# EAGLE board InkTime_PCB_4_layers (EAGLE 9.7.0)
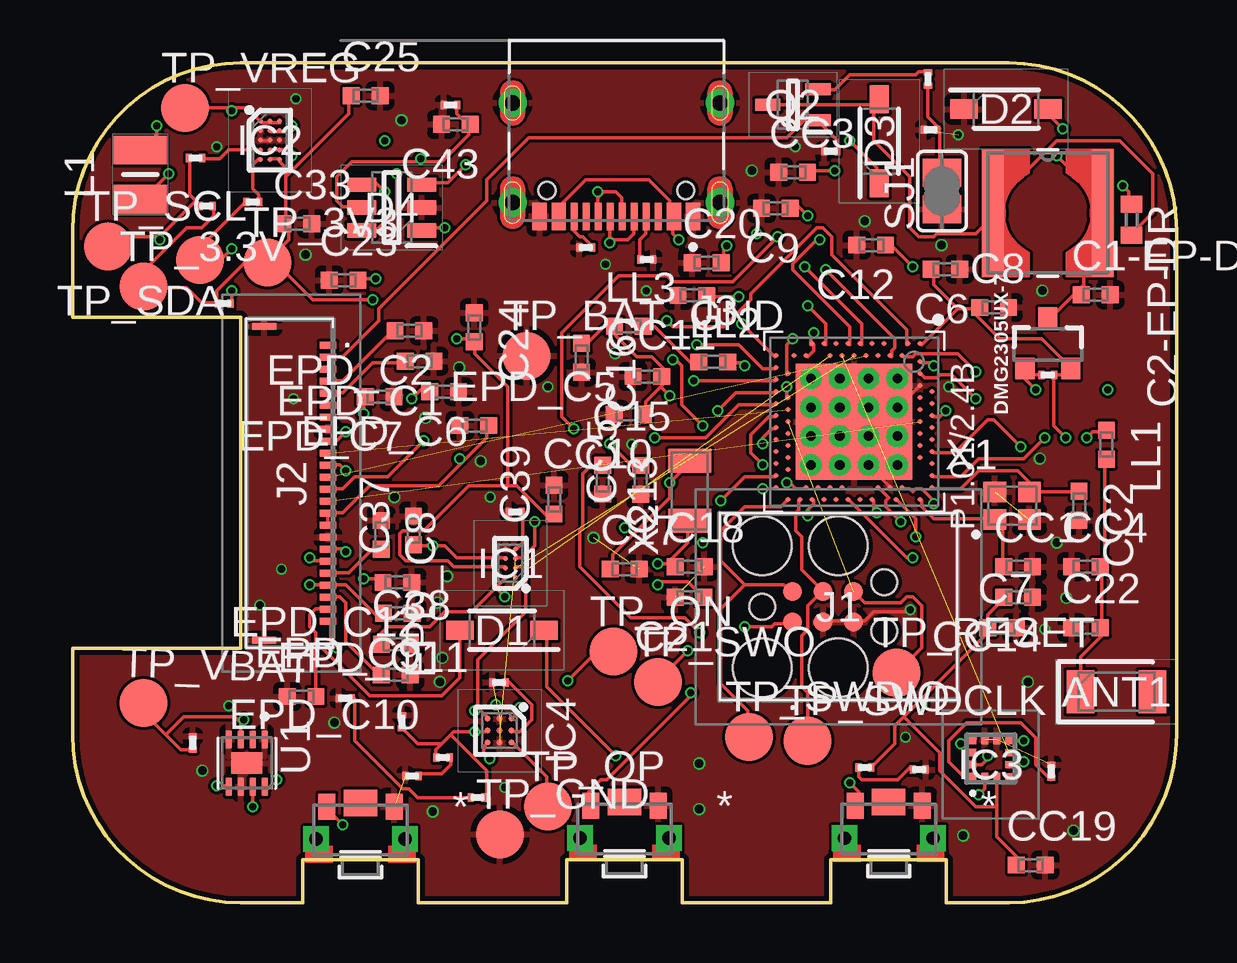
[diagram p0: board, top side]
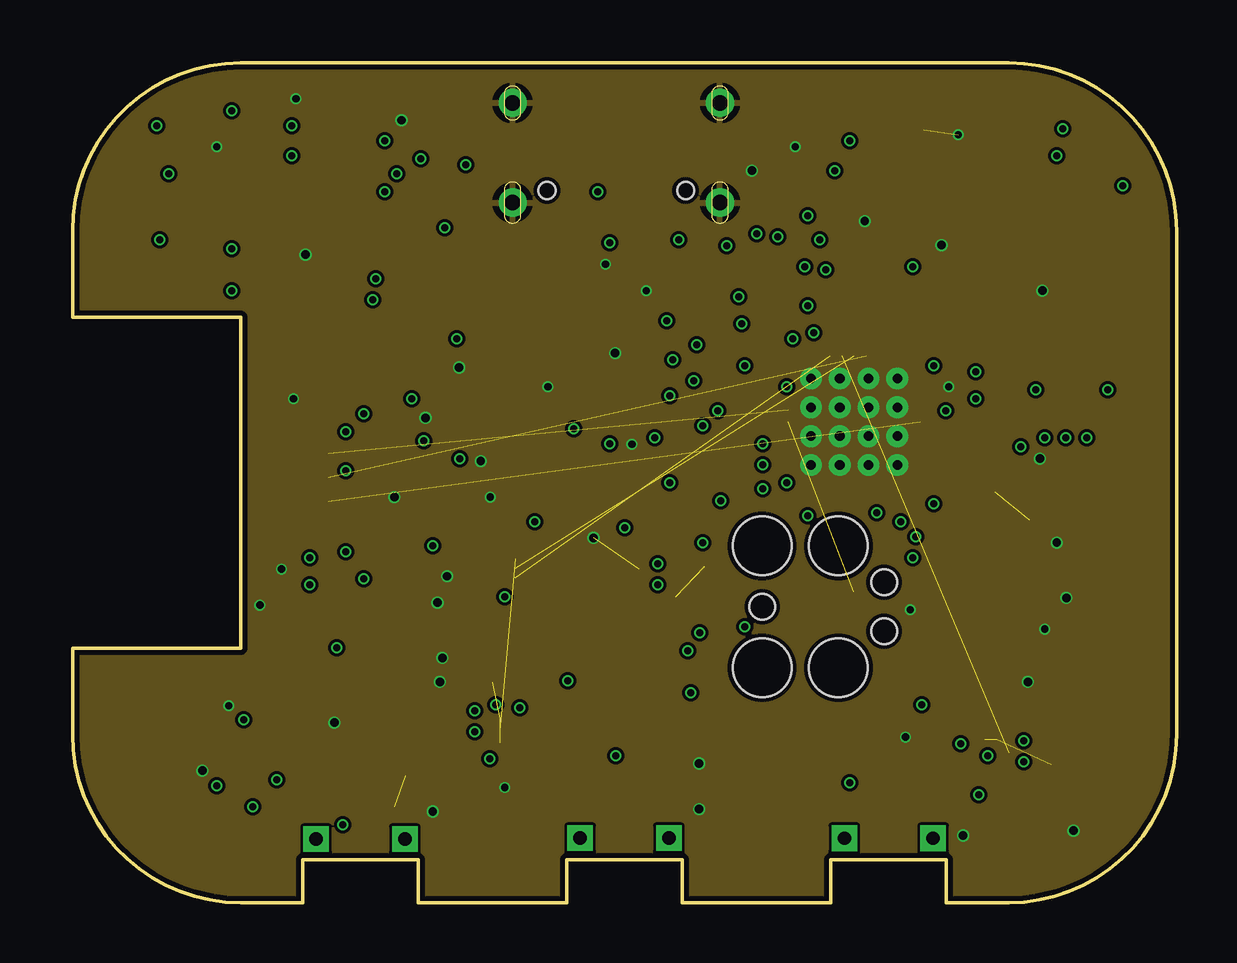
[diagram p1: board, inner layer Route2]
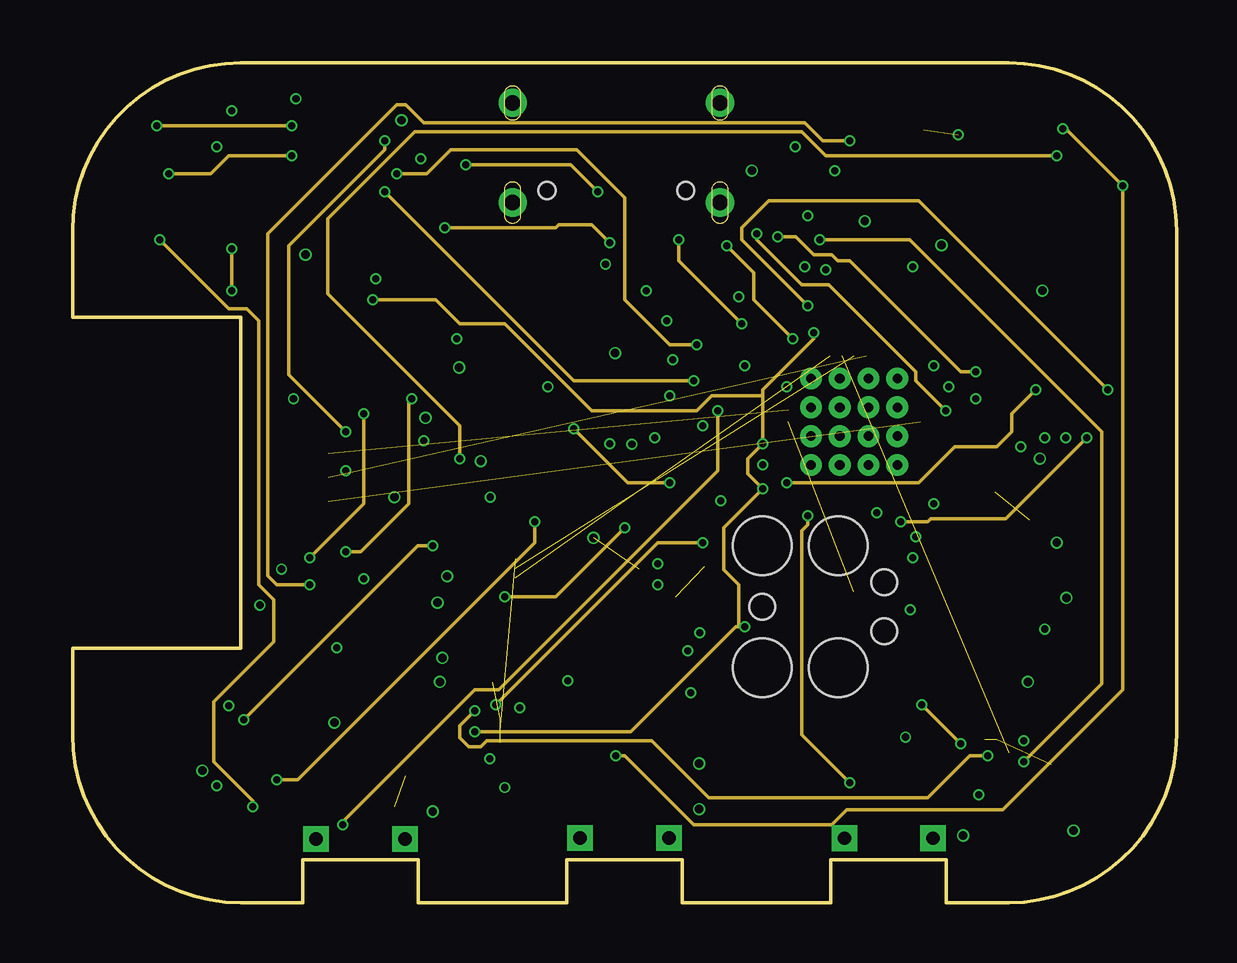
[diagram p2: board, inner layer Route15]
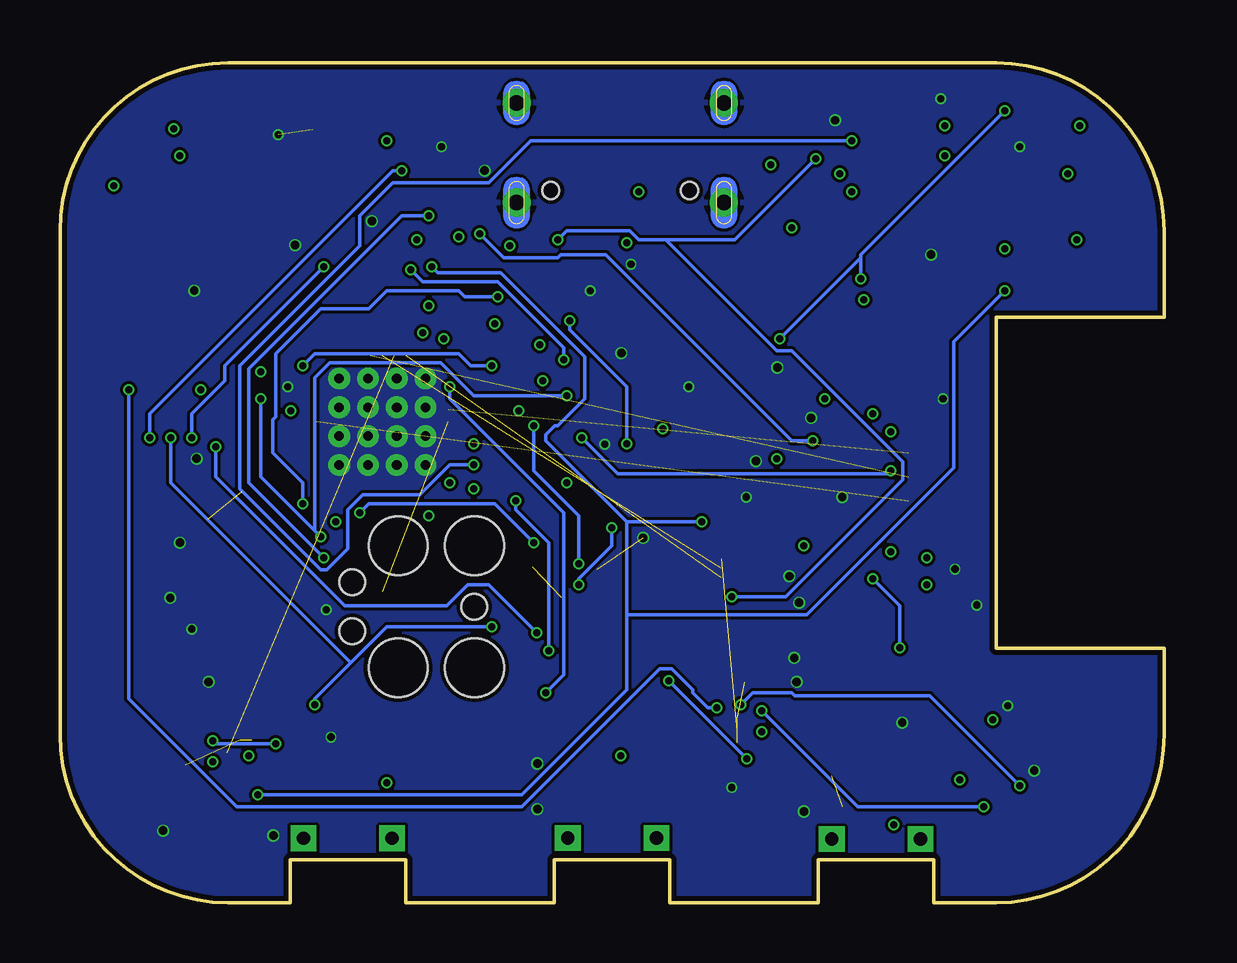
[diagram p3: board, bottom side, seen from below]

Size 46 x 35 mm. Coordinates in mm from the lower left corner, seen from the top.
Outline: 39,0 36.4,0 36.4,1.8 31.6,1.8 31.6,0 25.4,0 25.4,1.8 20.6,1.8 20.6,0 14.4,0 14.4,1.8 9.6,1.8 9.6,0 7,0 arc-90 0,7 0,10.6 7,10.6 7,24.4 0,24.4 0,28 arc-90 7,35 39,35 arc-90 46,28 46,7 arc-90 39,0
Copper layers (1+2*15+16): Top 0.035mm / dielectric 1.6mm / Route2 0.035mm / dielectric 0.15mm / Route15 0.035mm / dielectric 0.2mm / Bottom 0.035mm
Design rules "jlcpcb-2layerss.edru *": minimum track width 0.15mm, minimum drill 0.3mm, track to track 5mil, track to pad 5mil, pad to pad 5mil, via to via 5mil, smd to smd 5mil, copper to edge 0.2mm, drill to drill 6mil, minimum pad ring 10mil, minimum via ring 3mil, stop-mask expansion 4mil, vias tented up to drill 0mil, thermal gap 10mil
Net classes: 0 default: width 0.15 mm; 1 Power: width 0.3 mm

## Footprints (pad centres in the part's own frame; a part is rotated, then mirrored left to right if it is on the bottom)
2450AT18B100E_ANTC3216X140N = smd 1.15 x 1.8: 1 -1.5,0; 2 1.5,0
NORDIC_NRF_3_RESC0402_M = smd 0.7 x 0.7: 1 -0.6,0; 2 0.6,0
GRM011R60J152KE01L_1_0201 = smd 0.35 x 0.25: 1 0,0.275; 2 0,-0.275
ESP32_C6_LIBRARY_1_ESP32_WROVER_EAGLE-LTSPICE_C0402 = smd 0.7 x 0.9: 1 -0.65,0; 2 0.65,0
ESP32_C6_LIBRARY_5_SOD3716X135N = smd 1.15 x 0.8: 1 -1.75,0; 2 1.75,0
ESP32_C6_LIBRARY_3_SOT95P280X145-6N = smd 1.2 x 0.6: 1 -1.25,0.95; 2 -1.25,0; 3 -1.25,-0.95; 4 1.25,-0.95; 5 1.25,0; 6 1.25,0.95
ESP32_C6_LIBRARY_4_ESP32_C6_LIBRARY_4_ESP32_C6_LIBRARY_4_ESP32_C6_LIBRARY_4_ESP32_WROVER_SPARKFUN-DISCRETESEMI_SOT23-3 = smd 0.8 x 0.9: 1 -0.95,-1; 2 0.95,-1; 3 0,1.1
BQ25180YBGR_BGA8C40P2X4_100X155X50 = smd 0.2 x 0.2: A1 -0.2,0.6; A2 0.2,0.6; B1 -0.2,0.2; B2 0.2,0.2; C1 -0.2,-0.2; C2 0.2,-0.2; D1 -0.2,-0.6; D2 0.2,-0.6
RT6160AWSC_BGA15C40P3X5_140X230X60 = smd 0.216 x 0.216: A1 -0.4,0.8; A2 0,0.8; A3 0.4,0.8; B1 -0.4,0.4; B2 0,0.4; B3 0.4,0.4; C1 -0.4,0; C2 0,0; C3 0.4,0; D1 -0.4,-0.4; D2 0,-0.4; D3 0.4,-0.4; E1 -0.4,-0.8; E2 0,-0.8; E3 0.4,-0.8
BMA423_BMA423 = smd 0.3 x 0.35: 1 -0.75,-0.775; 2 -0.25,-0.775; 3 0.25,-0.775; 4 0.75,-0.775; 7 0.75,0.775; 8 0.25,0.775; 9 -0.25,0.775; 10 -0.75,0.775 | smd 0.35 x 0.3: 5 0.775,-0.25; 6 0.775,0.25; 11 -0.775,0.25; 12 -0.775,-0.25
DRV2605YZFR_BGA9C50P3X3_144X144X62 = smd 0.25 x 0.25: A1 -0.5,0.5; A2 0,0.5; A3 0.5,0.5; B1 -0.5,0; B2 0,0; B3 0.5,0; C1 -0.5,-0.5; C2 0,-0.5; C3 0.5,-0.5
TC2030-IDC_TC2030IDC = smd 0.783 x 0.783: 1 -0.953,-0.635; 2 -0.953,0.635; 3 0.317,-0.635; 4 0.317,0.635; 5 1.588,-0.635; 6 1.588,0.635 | hole 2.451: -2.223,-2.54; -2.223,2.54; 0.952,-2.54; 0.952,2.54 | hole 1.067: -2.223,0; 2.857,-1.016; 2.857,1.016
503480-2400_5034802400 = smd 0.3 x 0.7: 1 -5.75,1.525; 2 -5.25,1.525; 3 -4.75,1.525; 4 -4.25,1.525; 5 -3.75,1.525; 6 -3.25,1.525; 7 -2.75,1.525; 8 -2.25,1.525; 9 -1.75,1.525; 10 -1.25,1.525; 11 -0.75,1.525; 12 -0.25,1.525; 13 0.25,1.525; 14 0.75,1.525; 15 1.25,1.525; 16 1.75,1.525; 17 2.25,1.525; 18 2.75,1.525; 19 3.25,1.525; 20 3.75,1.525; 21 4.25,1.525; 22 4.75,1.525; 23 5.25,1.525; 24 5.75,1.525 | smd 0.3 x 1: MP1 -6.54,-1.125; MP2 6.54,-1.125
KH-TYPE-C-16P_KINGHELM_KH-TYPE-C-16P = smd 0.6 x 1.15: A1_B12 -3.2,4.725; A4_B9 -2.4,4.725; A9_B4 2.4,4.725; A12_B1 3.2,4.725 | smd 0.3 x 1.15: A5 -1.25,4.725; A6 -0.25,4.725; A7 0.25,4.725; A8 1.25,4.725; B5 1.75,4.725; B6 0.75,4.725; B7 -0.75,4.725; B8 -1.75,4.725 | drill 0.65 pad 1.05: SH1 -4.32,0; SH2 4.32,0; SH3 -4.32,4.15; SH4 4.32,4.15 | hole 0.7: -2.89,3.65; 2.89,3.65
MLP2016SR47MT0S1_INDC2016X100N = smd 1.2 x 2.2: 1 -1.028,0; 2 1.028,0
ESP32_C6_LIBRARY_2_IND_4828-WE-TPC_WRE = smd 0.9 x 5.3: 1 -2.286,0; 2 2.286,0
NORDIC_NRF_2_RESC0402_M = smd 0.7 x 0.7: 1 -0.6,0; 2 0.6,0
NORDIC_NRF_4_AQFN50P700X700X85_HS-74N = smd 4.85 x 4.85: P$74 0,0 | drill 0.4 pad 0.6: P$75 -1.8,1.8; P$76 -0.6,1.8; P$77 0.6,1.8; P$78 1.8,1.8; P$79 -1.8,0.6; P$80 -0.6,0.6; P$81 0.6,0.6; P$82 1.8,0.6; P$83 -1.8,-0.6; P$84 -0.6,-0.6; P$85 0.6,-0.6; P$86 1.8,-0.6; P$87 -1.8,-1.8; P$88 -0.6,-1.8; P$89 0.6,-1.8; P$90 1.8,-1.8 | smd 0.2 x 0.2: P$A8 -1.25,3.25; P$A10 -0.75,3.25; P$A12 -0.25,3.25; P$A14 0.25,3.25; P$A16 0.75,3.25; P$A18 1.25,3.25; P$A20 1.75,3.25; P$A22 2.25,3.25; P$A23 2.75,3.25; P$AA24 3.25,-2.25; P$AB2 -2.75,-2.5; P$AC5 -2,-2.75; P$AC9 -1,-2.75; P$AC11 -0.5,-2.75; P$AC13 0,-2.75; P$AC15 0.5,-2.75; P$AC17 1,-2.75; P$AC19 1.5,-2.75; P$AC21 2,-2.75; P$AC24 3.25,-2.75; P$AD2 -2.75,-3.25; P$AD4 -2.25,-3.25; P$AD6 -1.75,-3.25; P$AD8 -1.25,-3.25; P$AD10 -0.75,-3.25; P$AD12 -0.25,-3.25; P$AD14 0.25,-3.25; P$AD16 0.75,-3.25; P$AD18 1.25,-3.25; P$AD20 1.75,-3.25; P$AD22 2.25,-3.25; P$AD23 2.75,-3.25; P$B1 -3.25,2.75; P$B3 -2.5,2.75; P$B5 -2,2.75; P$B7 -1.5,2.75; P$B9 -1,2.75; P$B11 -0.5,2.75; P$B13 0,2.75; P$B15 0.5,2.75; P$B17 1,2.75; P$B19 1.5,2.75; P$B24 3.25,2.75; P$C1 -3.25,2.25; P$D2 -2.75,2; P$D23 2.75,2; P$E24 3.25,1.75; P$F2 -2.75,1.5; P$F23 2.75,1.5; P$G1 -3.25,1.25; P$H2 -2.75,1; P$H23 2.75,1; P$J1 -3.25,0.75; P$J24 3.25,0.75; P$K2 -2.75,0.5; P$L1 -3.25,0.25; P$L24 3.25,0.25; P$M2 -2.75,0; P$N1 -3.25,-0.25; P$N24 3.25,-0.25; P$P2 -2.75,-0.5; P$P23 2.75,-0.5; P$R1 -3.25,-0.75; P$R24 3.25,-0.75; P$T2 -2.75,-1; P$T23 2.75,-1; P$U1 -3.25,-1.25; P$U24 3.25,-1.25; P$V23 2.75,-1.5; P$W1 -3.25,-1.75; P$W24 3.25,-1.75; P$Y2 -2.75,-2; P$Y23 2.75,-2
ESP32_C6_LIBRARY_6_SOT65P210X110-3N = smd 1.05 x 0.5: 1 -1.05,0.65; 2 -1.05,-0.65; 3 1.05,0
CPF0201D7K68C1_0201 = smd 0.35 x 0.25: 1 0,0.275; 2 0,-0.275
ESP32_C6_LIBRARY_7_JUMPER_SJ = smd 1.168 x 1.6: 1 -0.762,0; 2 0.762,0
2025-10-22_07-23-44_LIBRARY_SW_EVP-AKE31A_PAN = smd 0.711 x 1.092: 1 -1.4,-0.972; 2 1.4,-0.972 | drill 0.559 pad 0.914 square: 3 -1.848,0.381; 4 1.848,0.381 | smd 1.397 x 1.092: 5 0,-1.124
HECTOR_WATCH_1_TP20R = smd 2 x 2: TP 0,0
ESP32_C6_LIBRARY_SON50P200X200X80-9N = smd 0.76 x 0.27: 1 -0.985,0.75; 2 -0.985,0.25; 3 -0.985,-0.25; 4 -0.985,-0.75; 5 0.985,-0.75; 6 0.985,-0.25; 7 0.985,0.25; 8 0.985,0.75 | smd 0.9 x 1.3: 9 0,0
NORDIC_NRF_BT-XTAL_2016_N = smd 0.95 x 0.85: 1 -0.725,-0.575; 2 0.725,-0.575; 3 0.725,0.575; 4 -0.725,0.575
NORDIC_NRF_1_XTAL_3215_N = smd 1 x 1.8: 1 -1.25,0; 2 1.25,0

## Placement (x,y rotation side)
ANT1  2450AT18B100E_2450AT18B100E  [2450AT18B100E_ANTC3216X140N]  43.5,8.79 0 top
C1-EP-DR  10uF  [NORDIC_NRF_3_RESC0402_M]  42.63,25.34 0 top
C2  GRM011R60J152KE01L_1_GRM011R60J152KE01L  [GRM011R60J152KE01L_1_0201]  5.01,6.66 0 top
C2-EP-DR  4.7uF/25V  [ESP32_C6_LIBRARY_1_ESP32_WROVER_EAGLE-LTSPICE_C0402]  44.13,28.46 270 top
C3  1uF  [GRM011R60J152KE01L_1_0201]  17.77,9.18 90 top
C4  0.1uF  [GRM011R60J152KE01L_1_0201]  13.73,7.54 0 top
C5  GRM011R60J152KE01L_1_GRM011R60J152KE01L  [GRM011R60J152KE01L_1_0201]  11.37,8.52 90 top
C6  4.7uF  [NORDIC_NRF_3_RESC0402_M]  36.37,26.4 180 top
C7  100nF  [NORDIC_NRF_3_RESC0402_M]  38.73,11.47 0 top
C8  100nF  [NORDIC_NRF_3_RESC0402_M]  38.4,24.81 0 top
C9  820pF  [NORDIC_NRF_3_RESC0402_M]  29.31,28.94 180 top
C10  GRM011R60J152KE01L_1_GRM011R60J152KE01L  [GRM011R60J152KE01L_1_0201]  35.28,5.55 270 top
C11  GRM011R60J152KE01L_1_GRM011R60J152KE01L  [GRM011R60J152KE01L_1_0201]  14.14,5.29 90 top
C12  100pF  [NORDIC_NRF_3_RESC0402_M]  33.28,27.41 180 top
C13  N.C  [NORDIC_NRF_3_RESC0402_M]  22.09,17.63 270 top
C15  1uF  [NORDIC_NRF_3_RESC0402_M]  23.95,21.93 180 top
C16  47nF  [NORDIC_NRF_3_RESC0402_M]  21.21,22.71 270 top
C17  12pF  [NORDIC_NRF_3_RESC0402_M]  23.01,13.91 0 top
C18  12pF  [NORDIC_NRF_3_RESC0402_M]  25.72,14.01 0 top
C20  4.7uF  [NORDIC_NRF_3_RESC0402_M]  26.43,26.68 0 top
C21  4.7uF  [NORDIC_NRF_3_RESC0402_M]  25.71,12.74 180 top
C22  N.C  [NORDIC_NRF_3_RESC0402_M]  42.23,11.47 0 top
C23  0.1uF  [NORDIC_NRF_3_RESC0402_M]  11.3,25.95 0 top
C24  10uF  [NORDIC_NRF_3_RESC0402_M]  16.74,23.98 270 top
C25  22uF  [NORDIC_NRF_3_RESC0402_M]  12.22,33.63 0 top
C33  22uF  [NORDIC_NRF_3_RESC0402_M]  9.36,28.3 0 top
C37  1uF  [NORDIC_NRF_3_RESC0402_M]  14.21,15.52 90 top
C38  1uF  [NORDIC_NRF_3_RESC0402_M]  13.48,10.78 0 top
C39  10uF  [NORDIC_NRF_3_RESC0402_M]  20.06,16.8 90 top
C42  GRM011R60J152KE01L_1_GRM011R60J152KE01L  [GRM011R60J152KE01L_1_0201]  15.75,33.25 90 top
C43  4.7uF  [NORDIC_NRF_3_RESC0402_M]  15.97,32.44 180 top
CC1  12pF  [NORDIC_NRF_3_RESC0402_M]  39.4,14.01 0 top
CC2  12pF  [NORDIC_NRF_3_RESC0402_M]  41.94,16.55 270 top
CC3  1pF  [NORDIC_NRF_3_RESC0402_M]  30.03,30.45 0 top
CC4  1pF  [NORDIC_NRF_3_RESC0402_M]  42.23,14.01 0 top
CC5  100nF  [NORDIC_NRF_3_RESC0402_M]  23.68,17.62 90 top
CC10  N.C  [NORDIC_NRF_3_RESC0402_M]  23.18,20.36 180 top
CC11  100pF  [NORDIC_NRF_3_RESC0402_M]  25.83,25.31 180 top
CC14  4.7uF  [NORDIC_NRF_3_RESC0402_M]  39.4,12.74 180 top
CC19  100nF  [NORDIC_NRF_3_RESC0402_M]  39.93,1.57 0 top
D1  ESP32_C6_LIBRARY_5_MBR0530  [ESP32_C6_LIBRARY_5_SOD3716X135N]  17.89,11.35 180 top
D2  ESP32_C6_LIBRARY_5_MBR0530  [ESP32_C6_LIBRARY_5_SOD3716X135N]  38.9,33.08 0 top
D3  ESP32_C6_LIBRARY_5_MBR0530  [ESP32_C6_LIBRARY_5_SOD3716X135N]  33.62,31.73 90 top
D4  ESP32_C6_LIBRARY_3_USBLC6-2SC6Y  [ESP32_C6_LIBRARY_3_SOT95P280X145-6N]  13.29,28.97 180 top
DMG2305UX-7  20V/4.2A/52mΩ/1.4W  [ESP32_C6_LIBRARY_4_ESP32_C6_LIBRARY_4_ESP32_C6_LIBRARY_4_ESP32_C6_LIBRARY_4_ESP32_WROVER_SPARKFUN-DISCRETESEMI_SOT23-3]  40.64,23.27 0 top
EPD_C1  1uF/50V  [NORDIC_NRF_3_RESC0402_M]  14.46,22.57 180 top
EPD_C2  1uF/50V  [NORDIC_NRF_3_RESC0402_M]  14.04,23.84 180 top
EPD_C5  0.1uF/50V  [NORDIC_NRF_3_RESC0402_M]  16.74,19.89 0 top
EPD_C6  1uF/50V  [NORDIC_NRF_3_RESC0402_M]  15.48,21.3 180 top
EPD_C7  1uF/50V  [NORDIC_NRF_3_RESC0402_M]  12.79,21.09 180 top
EPD_C8  1uF/50V  [NORDIC_NRF_3_RESC0402_M]  12.86,15.33 270 top
EPD_C9  1uF/50V  [NORDIC_NRF_3_RESC0402_M]  13.55,12.07 180 top
EPD_C10  1uF/50V  [NORDIC_NRF_3_RESC0402_M]  13.47,9.49 180 top
EPD_C11  1uF/50V  [NORDIC_NRF_3_RESC0402_M]  9.54,8.6 0 top
EPD_C12  1uF/50V  [NORDIC_NRF_3_RESC0402_M]  13.54,13.35 180 top
IC1  BQ25180YBGR_BQ25180YBGR  [BQ25180YBGR_BGA8C40P2X4_100X155X50]  18.25,14.15 180 top
IC2  RT6160AWSC_RT6160AWSC  [RT6160AWSC_BGA15C40P3X5_140X230X60]  8.22,31.78 0 top
IC3  BMA423_BMA423  [BMA423_BMA423]  38.26,6.01 359.8 top
IC4  DRV2605YZFR_DRV2605YZFR  [DRV2605YZFR_BGA9C50P3X3_144X144X62]  17.8,7.17 270 top
J1  TC2030-IDC_TC2030-IDC  [TC2030-IDC_TC2030IDC]  30.96,12.34 0 top
J2  503480-2400_503480-2400  [503480-2400_5034802400]  9.12,17.49 270 top
J3  KH-TYPE-C-16P_KH-TYPE-C-16P  [KH-TYPE-C-16P_KINGHELM_KH-TYPE-C-16P]  22.66,33.33 180 top
L1  MLP2016SR47MT0S1_FTC252012SR47MBCA  [MLP2016SR47MT0S1_INDC2016X100N]  2.82,30.34 270 top
L5  ESP32_C6_LIBRARY_2_744043680IND_4828-WE-TPC_WRE  [ESP32_C6_LIBRARY_2_IND_4828-WE-TPC_WRE]  40.64,28.75 0 top
LL1  3.9nH  [NORDIC_NRF_2_RESC0402_M]  43.08,19.09 270 top
LL2  10uH  [NORDIC_NRF_2_RESC0402_M]  26.7,22.54 0 top
LL3  15uH  [NORDIC_NRF_2_RESC0402_M]  23.18,24.02 0 top
P1.01/2.4B  NORDIC_NRF_4_NRF52840_QF  [NORDIC_NRF_4_AQFN50P700X700X85_HS-74N]  32.57,20.05 270 top
Q2  ESP32_C6_LIBRARY_6_SI1308EDL-T1-GE3  [ESP32_C6_LIBRARY_6_SOT65P210X110-3N]  30.01,33.25 180 top
R1_EP_DR  CPF0201D7K68C1_CPF0201D7K68C1  [CPF0201D7K68C1_0201]  35.65,34.32 180 top
R2  CPF0201D7K68C1_CPF0201D7K68C1  [CPF0201D7K68C1_0201]  5.12,31.04 90 top
R2_EP_DR  CPF0201D7K68C1_CPF0201D7K68C1  [CPF0201D7K68C1_0201]  31.59,31.32 90 top
R3  CPF0201D7K68C1_CPF0201D7K68C1  [CPF0201D7K68C1_0201]  7.51,29.2 90 top
R4  CPF0201D7K68C1_CPF0201D7K68C1  [CPF0201D7K68C1_0201]  5.58,29.04 90 top
R5  CPF0201D7K68C1_CPF0201D7K68C1  [CPF0201D7K68C1_0201]  6.32,24.97 270 top
R8  CPF0201D7K68C1_CPF0201D7K68C1  [CPF0201D7K68C1_0201]  40.78,5.48 180 top
R9  10K  [CPF0201D7K68C1_0201]  18.45,16.29 90 top
R11  CPF0201D7K68C1_CPF0201D7K68C1  [CPF0201D7K68C1_0201]  16.88,4.38 90 top
R12  CPF0201D7K68C1_CPF0201D7K68C1  [CPF0201D7K68C1_0201]  33.01,5.64 90 top
R13  CPF0201D7K68C1_CPF0201D7K68C1  [CPF0201D7K68C1_0201]  15.43,6.05 270 top
R14  CPF0201D7K68C1_CPF0201D7K68C1  [CPF0201D7K68C1_0201]  23.93,26.8 90 top
R15  CPF0201D7K68C1_CPF0201D7K68C1  [CPF0201D7K68C1_0201]  21.39,27.31 90 top
R_PWR_EPD  CPF0201D7K68C1_CPF0201D7K68C1  [CPF0201D7K68C1_0201]  40.64,22 90 top
R_TYPE_SEL  CPF0201D7K68C1_CPF0201D7K68C1  [CPF0201D7K68C1_0201]  35.75,32.21 90 top
SJ1  0  [ESP32_C6_LIBRARY_7_JUMPER_SJ]  36.22,29.66 90 top
SW1  2025-10-22_07-23-44_LIBRARY_EVP-AKE31ASW_EVP-AKE31A_PAN  [2025-10-22_07-23-44_LIBRARY_SW_EVP-AKE31A_PAN]  12,3.03 180 top
SW2  2025-10-22_07-23-44_LIBRARY_EVP-AKE31ASW_EVP-AKE31A_PAN  [2025-10-22_07-23-44_LIBRARY_SW_EVP-AKE31A_PAN]  23,3.08 180 top
SW3  2025-10-22_07-23-44_LIBRARY_EVP-AKE31ASW_EVP-AKE31A_PAN  [2025-10-22_07-23-44_LIBRARY_SW_EVP-AKE31A_PAN]  34.01,3.07 180 top
TP_3.3V  HECTOR_WATCH_1_TPTP20R  [HECTOR_WATCH_1_TP20R]  2.96,25.68 0 top
TP_3V3  HECTOR_WATCH_1_TPTP20R  [HECTOR_WATCH_1_TP20R]  8.12,26.68 0 top
TP_BAT_GND  HECTOR_WATCH_1_TPTP20R  [HECTOR_WATCH_1_TP20R]  18.92,22.79 0 top
TP_GND  HECTOR_WATCH_1_TPTP20R  [HECTOR_WATCH_1_TP20R]  17.8,2.85 0 top
TP_ON  HECTOR_WATCH_1_TPTP20R  [HECTOR_WATCH_1_TP20R]  22.54,10.47 0 top
TP_OP  HECTOR_WATCH_1_TPTP20R  [HECTOR_WATCH_1_TP20R]  19.81,4.01 0 top
TP_RESET  HECTOR_WATCH_1_TPTP20R  [HECTOR_WATCH_1_TP20R]  34.33,9.59 0 top
TP_SCL  HECTOR_WATCH_1_TPTP20R  [HECTOR_WATCH_1_TP20R]  1.48,27.35 0 top
TP_SDA  HECTOR_WATCH_1_TPTP20R  [HECTOR_WATCH_1_TP20R]  5.31,26.78 180 top
TP_SWDCLK  HECTOR_WATCH_1_TPTP20R  [HECTOR_WATCH_1_TP20R]  30.62,6.75 0 top
TP_SWDIO  HECTOR_WATCH_1_TPTP20R  [HECTOR_WATCH_1_TP20R]  28.19,6.92 0 top
TP_SWO  HECTOR_WATCH_1_TPTP20R  [HECTOR_WATCH_1_TP20R]  24.39,9.2 0 top
TP_VBAT  HECTOR_WATCH_1_TPTP20R  [HECTOR_WATCH_1_TP20R]  2.96,8.33 358.1 top
TP_VREG  HECTOR_WATCH_1_TPTP20R  [HECTOR_WATCH_1_TP20R]  4.69,33.12 0 top
U1  ESP32_C6_LIBRARY_MAX17048G+T10  [ESP32_C6_LIBRARY_SON50P200X200X80-9N]  7.26,5.82 270 top
X1  32MHz  [NORDIC_NRF_BT-XTAL_2016_N]  39.15,16.55 0 top
X2  32.768KHz  [NORDIC_NRF_1_XTAL_3215_N]  25.72,17.17 90 top

## Library data of the parts
ANT1 = InkTime_v5; ARROW_PART_NUMBER: 2450AT18B100E; ARROW_PRICE-STOCK: https://www.arrow.com/en/products/2450at18b100e/johanson-dielectrics?utm_currency=USD&region=nac; DESCRIPTION: Antennas 2.45GHz ANTENNA; HEIGHT: 1.4mm; MANUFACTURER_NAME: JOHANSON TECHNOLOGY; MANUFACTURER_PART_NUMBER: 2450AT18B100E; MOUSER_PART_NUMBER: 609-2450AT18B100E; MOUSER_PRICE-STOCK: https://www.mouser.co.uk/ProductDetail/Johanson-Technology/2450AT18B100E?qs=yCnrNFeXz%252Bh5MFsFIXGZGA%3D%3D
C1-EP-DR C2-C13 C15-C18 C20-C25 C33 C37-C39 C42 C43 CC1-CC5 CC10 CC11 CC14 CC19 EPD_C1 EPD_C2 EPD_C5-EPD_C12 LL1-LL3 P1.01/2.4B R1_EP_DR R2 R2_EP_DR R3-R5 R8 R9 R11-R15 R_PWR_EPD R_TYPE_SEL SJ1 TP_3.3V TP_3V3 TP_BAT_GND TP_GND TP_ON TP_OP TP_RESET TP_SCL TP_SDA TP_SWDCLK TP_SWDIO TP_SWO TP_VBAT TP_VREG X1 X2 = InkTime_v5
C2-EP-DR = InkTime_v5; SPICEMODEL: NONE; SPICEPREFIX: C
D1-D3 = InkTime_v5; AVAILABILITY: In Stock; CHECK_PRICES: https://www.snapeda.com/parts/MBR0530/Onsemi/view-part/?ref=eda; DESCRIPTION: Diode Schottky 30 V 500mA Surface Mount SOD-123; MF: ON Semiconductor; MP: MBR0530; PACKAGE: SOD-123-2 ON Semiconductor; PRICE: None; PURCHASE-URL: https://www.snapeda.com/api/url_track_click_mouser/?unipart_id=179458&manufacturer=ON Semiconductor&part_name=MBR0530&search_term=None; SNAPEDA_LINK: https://www.snapeda.com/parts/MBR0530/Onsemi/view-part/?ref=snap
D4 = InkTime_v5; AVAILABILITY: In Stock; CHECK_PRICES: https://www.snapeda.com/parts/USBLC6-2SC6Y/STMicroelectronics/view-part/?ref=eda; DESCRIPTION: 17V Clamp 5A (8/20µs) Ipp Tvs Diode Surface Mount SOT-23-6; MF: STMicroelectronics; MP: USBLC6-2SC6Y; PACKAGE: SOT-23-6 STMicroelectronics; PRICE: None; SNAPEDA_LINK: https://www.snapeda.com/parts/USBLC6-2SC6Y/STMicroelectronics/view-part/?ref=snap
DMG2305UX-7 = InkTime_v5; PROD_ID: TRAN-14388
IC1 = InkTime_v5; ARROW_PART_NUMBER: BQ25180YBGR; ARROW_PRICE-STOCK: https://www.arrow.com/en/products/bq25180ybgr/texas-instruments?utm_currency=USD&region=nac; DESCRIPTION: Charger IC Lithium Ion/Polymer, Lithium Iron Phosphate 8-DSBGA (1.6x1.1); HEIGHT: 0.5mm; MANUFACTURER_NAME: Texas Instruments; MANUFACTURER_PART_NUMBER: BQ25180YBGR; MOUSER_PART_NUMBER: 595-BQ25180YBGR; MOUSER_PRICE-STOCK: https://www.mouser.co.uk/ProductDetail/Texas-Instruments/BQ25180YBGR?qs=doiCPypUmgEWjAK%252BJAX6Tw%3D%3D
IC2 = InkTime_v5; DESCRIPTION: Buck-Boost Regulator Positive Output Step-Up/Step-Down I2C DC-DC Controller IC 15-WL-CSP (BSC) (1.4x2.3); HEIGHT: 0.6mm; MANUFACTURER_NAME: RICHTEK; MANUFACTURER_PART_NUMBER: RT6160AWSC; MOUSER_PART_NUMBER: 835-RT6160AWSC; MOUSER_PRICE-STOCK: https://www.mouser.co.uk/ProductDetail/Richtek/RT6160AWSC?qs=amGC7iS6iy%2FLd9PSoixZXQ%3D%3D
IC3 = InkTime_v5; ARROW_PART_NUMBER: BMA423; ARROW_PRICE-STOCK: https://www.arrow.com/en/products/bma423/bosch; DESCRIPTION: Accelerometers Triaxial low-g 12bit Acceleration Sensor; HEIGHT: 1mm; MANUFACTURER_NAME: BOSCH; MANUFACTURER_PART_NUMBER: BMA423; MOUSER_PART_NUMBER: 262-BMA423; MOUSER_PRICE-STOCK: https://www.mouser.co.uk/ProductDetail/Bosch-Sensortec/BMA423?qs=HXFqYaX1Q2xC%252BSgeGoX3mg%3D%3D
IC4 = InkTime_v5; ARROW_PART_NUMBER: DRV2605YZFR; ARROW_PRICE-STOCK: https://www.arrow.com/en/products/drv2605yzfr/texas-instruments?region=nac; DESCRIPTION: Haptic Driver for ERM/LRA with Built-In Library and Smart Loop Architecture; HEIGHT: 0.625mm; MANUFACTURER_NAME: Texas Instruments; MANUFACTURER_PART_NUMBER: DRV2605YZFR
J1 = InkTime_v5; DESCRIPTION: CABLE ADAPTER 6 POS; HEIGHT: 19mm; MANUFACTURER_NAME: Tag Connect; MANUFACTURER_PART_NUMBER: TC2030-IDC
J2 = InkTime_v5; DESCRIPTION: FFC & FPC Connectors 0.5mm FPC RA SMT Dual Contact 24Ckt; HEIGHT: 1.87mm; MANUFACTURER_NAME: Molex; MANUFACTURER_PART_NUMBER: 503480-2400; MOUSER_PART_NUMBER: 538-503480-2400; MOUSER_PRICE-STOCK: https://www.mouser.co.uk/ProductDetail/Molex/503480-2400?qs=OAhjpuo3Vu7efIoxFh9AOw%3D%3D
J3 = InkTime_v5; AVAILABILITY: Not in stock; CHECK_PRICES: https://www.snapeda.com/parts/KH-TYPE-C-16P/Kinghelm/view-part/?ref=eda; MF: kinghelm; MP: KH-TYPE-C-16P; PACKAGE: None; PRICE: None; SNAPEDA_LINK: https://www.snapeda.com/parts/KH-TYPE-C-16P/Kinghelm/view-part/?ref=snap
L1 = InkTime_v5; DESCRIPTION: SMD / SMT Inductors (Coils), L=0.47?H, L x W x T :; HEIGHT: 1mm; JLCPCB: https://jlcpcb.com/partdetail/6763488-FTC252012SR47MBCA/C5832368; MANUFACTURER_NAME: TDK; MANUFACTURER_PART_NUMBER: FTC252012SR47MBCA
L5 = InkTime_v5; COPYRIGHT: Copyright (C) 2024 Ultra Librarian. All rights reserved.; MANUFACTURER_PART_NUMBER: 744043680; MFR_NAME: Wurth Electronics
Q2 = InkTime_v5; AVAILABILITY: In Stock; CHECK_PRICES: https://www.snapeda.com/parts/SI1308EDL-T1-GE3/Vishay+Siliconix/view-part/?ref=eda; DESCRIPTION: Si1308EDL-T1-GE3 N-channel MOSFET Transistor, 1.5 A, 30 V, 3-Pin SC-70 | Siliconix / Vishay SI1308EDL-T1-GE3; MF: Vishay Siliconix; MP: SI1308EDL-T1-GE3; PACKAGE: SOT-323 Vishay Semiconductor; PRICE: None; PURCHASE-URL: https://www.snapeda.com/api/url_track_click_mouser/?unipart_id=274603&manufacturer=Vishay Siliconix&part_name=SI1308EDL-T1-GE3&search_term=None; SNAPEDA_LINK: https://www.snapeda.com/parts/SI1308EDL-T1-GE3/Vishay+Siliconix/view-part/?ref=snap
SW1-SW3 = InkTime_v5; COPYRIGHT: Copyright (C) 2025 Ultra Librarian. All rights reserved.; DIGI-KEY_PART_NUMBER_1: P123437TR-ND; DIGI-KEY_PART_NUMBER_2: P123437CT-ND; DIGI-KEY_PART_NUMBER_3: P123437DKR-ND; MANUFACTURER_NAME: Panasonic; MANUFACTURER_PART_NUMBER: EVP-AKE31A
U1 = InkTime_v5; AVAILABILITY: In Stock; CHECK_PRICES: https://www.snapeda.com/parts/MAX17048G+T10/Analog+Devices/view-part/?ref=eda; DESCRIPTION: 3µA 1-Cell/2-Cell Fuel Gauge with ModelGauge; MF: Analog Devices; MP: MAX17048G+T10; PACKAGE: TDFN-8 Maxim; PRICE: None; PURCHASE-URL: https://www.snapeda.com/api/url_track_click_mouser/?unipart_id=329239&manufacturer=Analog Devices&part_name=MAX17048G+T10&search_term=None; SNAPEDA_LINK: https://www.snapeda.com/parts/MAX17048G+T10/Analog+Devices/view-part/?ref=snap

## Nets
3V3 [PW]: C4.2 C6.2 C7.1 C8.1 C25.1 C33.1 CC14.2 CC19.1 DMG2305UX-7.2 IC2.E2 IC2.E3 IC3.3 IC3.7 IC3.10 IC4.C2 J1.1 P1.01/2.4B.P$AD14 P1.01/2.4B.P$AD23 P1.01/2.4B.P$B1 P1.01/2.4B.P$W1 P1.01/2.4B.P$Y2 R4.2 R5.2 R11.2 R12.2 R13.2 R_PWR_EPD.2 TP_3.3V.TP TP_3V3.TP
ALERT: P1.01/2.4B.P$J24 U1.5
D+: D4.4 P1.01/2.4B.P$AD6
D-: D4.6 P1.01/2.4B.P$AD4
DN: D4.1 J3.A7 J3.B7
DP: D4.3 J3.A6 J3.B6
EPD_3V3: C1-EP-DR.1 DMG2305UX-7.3 EPD_C5.2 J2.15 J2.16 L5.2
EPD_BUSY: J2.9 P1.01/2.4B.P$AD12
EPD_CS: J2.12 P1.01/2.4B.P$K2
EPD_DC: J2.11 P1.01/2.4B.P$AD10
EPD_RST: J2.10 P1.01/2.4B.P$AC11
GDR: J2.2 Q2.1 R2_EP_DR.2
GND: C1-EP-DR.2 C2.1 C3.1 C4.1 C5.1 C6.1 C7.2 C8.2 C9.2 C10.1 C11.1 C12.2 C13.2 C15.2 C16.2 C17.2 C18.2 C20.1 C21.2 C22.1 C23.1 C24.1 C25.2 C33.2 C37.2 C38.2 C39.2 C42.1 C43.2 CC1.2 CC2.2 CC3.1 CC4.1 CC5.1 CC10.2 CC11.2 CC14.1 CC19.2 D2.1 D4.2 EPD_C1.1 EPD_C2.1 EPD_C5.1 EPD_C6.1 EPD_C7.1 EPD_C8.1 EPD_C9.1 EPD_C10.1 EPD_C11.1 EPD_C12.1 IC1.D2 IC2.B1 IC2.C1 IC2.C2 IC2.C3 IC3.8 IC3.9 IC4.B1 IC4.B3 J1.3 J1.5 J2.8 J2.17 J2.MP1 J2.MP2 J3.A1_B12 J3.A12_B1 J3.SH1 J3.SH2 J3.SH3 J3.SH4 P1.01/2.4B.P$74 P1.01/2.4B.P$75 P1.01/2.4B.P$76 P1.01/2.4B.P$77 P1.01/2.4B.P$78 P1.01/2.4B.P$79 P1.01/2.4B.P$80 P1.01/2.4B.P$81 P1.01/2.4B.P$82 P1.01/2.4B.P$83 P1.01/2.4B.P$84 P1.01/2.4B.P$85 P1.01/2.4B.P$86 P1.01/2.4B.P$87 P1.01/2.4B.P$88 P1.01/2.4B.P$89 P1.01/2.4B.P$90 P1.01/2.4B.P$B7 P1.01/2.4B.P$F23 R2_EP_DR.1 R8.2 R9.1 R14.2 R15.1 R_TYPE_SEL.1 SJ1.1 SW1.1 SW2.1 SW3.1 TP_BAT_GND.TP TP_GND.TP U1.1 U1.4 U1.6 U1.9 X1.2 X1.4
HAPTIC_EN: IC4.A1 P1.01/2.4B.P$U1
IMU_INT1: IC3.5 P1.01/2.4B.P$N1
IMU_INT2: IC3.6 P1.01/2.4B.P$P2
LX1: IC2.B2 IC2.B3 L1.1
LX2: IC2.D2 IC2.D3 L1.2
MOSI: J2.14 P1.01/2.4B.P$B13
N$1: IC1.D1 R9.2
N$2: C9.1 P1.01/2.4B.P$N24
N$3: CC3.2 LL1.1 P1.01/2.4B.P$H23
N$4: IC2.D1 R2.2
N$5: IC2.E1 R3.2
N$6: C20.2 P1.01/2.4B.P$AC5
N$7: ANT1.1 C22.2 CC4.2 LL1.2
N$8: CC1.1 P1.01/2.4B.P$B24 X1.1
N$9: CC2.1 P1.01/2.4B.P$A23 X1.3
N$10: CC11.1 P1.01/2.4B.P$D23
N$11: C18.1 P1.01/2.4B.P$F2 X2.1
N$12: C12.1 P1.01/2.4B.P$A22
N$13: C13.1 P1.01/2.4B.P$A18
N$14: LL2.1 LL3.2
N$15: LL2.2 P1.01/2.4B.P$B3
N$17: C15.1 C16.1 CC10.1 LL3.1 P1.01/2.4B.P$B5 P1.01/2.4B.P$E24
N$18: C17.1 P1.01/2.4B.P$D2 X2.2
N$19: IC3.1 R8.1
N$20: CC5.2 P1.01/2.4B.P$C1
N$21: C2-EP-DR.1 D1.1 D2.2
N$22: Q2.2 R1_EP_DR.2
N$23: R1_EP_DR.1 R_TYPE_SEL.2 SJ1.2
N$24: C2-EP-DR.2 D3.2 L5.1 Q2.3
N$25: EPD_C2.2 J2.4
N$26: EPD_C1.2 J2.5
N$27: J3.B5 R15.2
N$28: EPD_C7.2 J2.19
N$29: C5.2 R11.1
N$30: EPD_C12.2 J2.24
N$31: EPD_C6.2 J2.18
N$32: EPD_C8.2 J2.20
N$33: C10.2 R12.1
N$34: EPD_C10.2 J2.22
N$35: C11.2 R13.1
N$36: J3.A5 R14.1
N$37: C3.2 IC4.A2
OUT+: IC4.A3 TP_OP.TP
OUT-: IC4.C3 TP_ON.TP
P0.04: P1.01/2.4B.P$J1
P0.09: P1.01/2.4B.P$L24
P0.13: P1.01/2.4B.P$AD8 SW1.2
P0.14: P1.01/2.4B.P$AC9 SW2.2
P0.19: P1.01/2.4B.P$AC15
P0.20: P1.01/2.4B.P$AD16
P0.21: P1.01/2.4B.P$AC17
P0.22: P1.01/2.4B.P$AD18
P0.23: P1.01/2.4B.P$AC19
P0.24: P1.01/2.4B.P$AD20
P0.25: P1.01/2.4B.P$AC21
P0.26: P1.01/2.4B.P$G1
P0.27: P1.01/2.4B.P$H2
P0.28: P1.01/2.4B.P$B11
P0.29: P1.01/2.4B.P$A10
P0.30: P1.01/2.4B.P$B9
P0.31: P1.01/2.4B.P$A8
P1.01: DMG2305UX-7.1 P1.01/2.4B.P$Y23 R_PWR_EPD.1
P1.02: P1.01/2.4B.P$W24 SW3.2
P1.03: P1.01/2.4B.P$V23
P1.04: P1.01/2.4B.P$U24
P1.05: P1.01/2.4B.P$T23
P1.06: P1.01/2.4B.P$R24
P1.07: P1.01/2.4B.P$P23
P1.09: P1.01/2.4B.P$R1
P1.10: P1.01/2.4B.P$A20
P1.11: P1.01/2.4B.P$B19
P1.12: P1.01/2.4B.P$B17
P1.13: P1.01/2.4B.P$A16
P1.14: P1.01/2.4B.P$B15
P1.15: P1.01/2.4B.P$A14
PMIC_INT: IC1.A1 P1.01/2.4B.P$T2
PREVGH: D3.1 EPD_C9.2 J2.21
PREVGL: D1.2 EPD_C11.2 J2.23
RESE: J2.3
RESET: J1.6 P1.01/2.4B.P$AC13 TP_RESET.TP
SCK: J2.13 P1.01/2.4B.P$A12
SCL: IC1.B1 IC3.12 IC4.C1 P1.01/2.4B.P$M2 R2.1 R4.1 TP_SCL.TP U1.7
SDA: IC1.C1 IC3.2 IC4.B2 P1.01/2.4B.P$L1 R3.1 R5.1 TP_SDA.TP U1.8
SWDCLK: J1.4 P1.01/2.4B.P$AA24 TP_SWDCLK.TP
SWDIO: J1.2 P1.01/2.4B.P$AC24 TP_SWDIO.TP
SWO: P1.01/2.4B.P$AD22 TP_SWO.TP
VBAT [PW]: C2.2 C37.1 IC1.C2 TP_VBAT.TP U1.2 U1.3
VBUS [PW]: C21.1 C38.1 C42.2 C43.1 D4.5 IC1.A2 J3.A4_B9 J3.A9_B4 P1.01/2.4B.P$AD2
VREG: C23.2 C24.2 C39.1 IC1.B2 IC2.A1 IC2.A2 IC2.A3 TP_VREG.TP

## Tracks (layer width: path | path; a pad name or v marks a point on that pad's centre or on a via)
3V3  (via drill 0.3)
  Top 0.15: R4.2 5.88,29.01 5.88,28.63 5.38,28.13 4.76,28.13 3.01,26.38 3.01,25.76 TP_3.3V.TP 3.01,25.63 4.76,25.63 5.38,25.01 6.01,25.01 | 6.01,25.01 6.01,25.51 7.13,26.63 8.01,26.63 TP_3V3.TP | IC2.E2 8.26,31.01 8.63,31.01 IC2.E3 8.63,30.88 8.88,30.63 8.88,30.26 | 8.88,30.26 8.88,28.38 C33.1 8.88,28.26 9.01,28.13 9.01,27.63 8.26,26.88 | 8.88,30.26 11.51,32.88 11.51,33.51 C25.1 | 8.26,26.88 8.13,26.76 TP_3V3.TP | 6.01,25.01 R5.2 | 36.88,24.76 35.38,23.26 P1.01/2.4B.P$B1 | 37.63,24.76 37.76,24.76 C8.1 37.63,24.76 | 37.63,24.76 36.88,24.76 | 36.88,24.76 35.88,25.76 35.88,26.38 C6.2 | 37.63,24.76 37.63,24.51 38.63,23.51 40.38,23.51 41.51,22.38 DMG2305UX-7.2 41.51,22.26 41.26,22.01 41.01,22.01 R_PWR_EPD.2 40.88,21.88 40.88,19.88 v41.38,19.38 | P1.01/2.4B.P$Y2 30.63,22.76 30.88,23.01 30.88,23.26 P1.01/2.4B.P$W1 30.76,23.26 30.76,23.63 v30.88,23.76 | v28.76,17.26 29.26,17.26 P1.01/2.4B.P$AD23 | v28.76,19.13 28.76,19.38 29.13,19.76 29.26,19.76 P1.01/2.4B.P$AD14 | 15.38,6.63 15.13,6.38 15.13,6.13 R13.2 | 15.38,6.63 15.76,7.01 | 15.76,7.01 15.88,7.13 v16.76,7.13 17.26,7.13 IC4.C2 | 15.76,7.01 17.26,5.51 17.26,4.51 R11.2 | 15.38,6.63 14.38,6.63 13.76,7.26 C4.2 | 38.51,4.01 38.51,2.76 39.38,1.88 39.38,1.63 CC19.1 | 38.51,4.01 38.51,5.13 IC3.3 | 35.26,8.38 38.01,11.13 38.01,11.38 C7.1 38.13,11.51 38.13,12.01 38.76,12.63 CC14.2 | 35.26,8.38 34.63,7.76 | 34.63,7.76 34.26,7.38 34.26,6.63 33.38,5.76 R12.2 | v37.01,6.63 37.13,6.76 37.51,6.76 IC3.10 | 35.26,8.38 v35.38,8.26 | v39.63,6.76 39.13,6.76 IC3.7 | v28.01,11.51 29.13,11.51 29.26,11.63 29.88,11.63 J1.1 | 38.51,4.01 37.63,4.01 36.13,5.51 36.13,6.26 34.63,7.76
  Top 0.15: 8.26,26.88 10.01,25.13 v12.51,25.13 | 8.26,26.88 TP_3V3.TP
  Route15 0.15: v30.88,23.76 30.88,23.51 28.76,21.38 28.76,21.13 | 28.76,21.13 v28.76,19.13 28.13,18.51 28.13,17.88 v28.76,17.26 27.13,15.63 27.13,13.88 27.76,13.26 27.76,11.51 | v35.38,8.26 v37.01,6.63 | v16.76,7.13 23.26,7.13 27.63,11.51 27.76,11.51 | 27.76,11.51 v28.01,11.51 | v12.51,25.13 15.13,25.13 16.13,24.13 18.01,24.13 21.63,20.51 26.01,20.51 26.63,21.13 28.76,21.13
  Bottom 0.15: v39.63,6.76 39.51,6.63 v37.01,6.63 | v28.01,11.51 32.38,11.51 33.88,10.01 | 33.88,10.01 35.38,8.51 v35.38,8.26 | v41.38,19.38 41.38,17.51 33.88,10.01
ALERT  (via drill 0.3)
  Top 0.15: v33.51,16.26 33.38,16.38 33.38,16.76 P1.01/2.4B.P$J24 | v6.01,4.88 6.51,4.88 U1.5
  Route15 0.15: v26.26,15.01 24.38,15.01 v17.63,8.26
  Bottom 0.15: v33.51,16.26 33.13,16.63 27.88,16.63 v26.26,15.01 | v17.63,8.26 17.13,8.76 15.51,8.76 15.38,8.63 9.76,8.63 v6.01,4.88
D+  (via drill 0.3)
  Top 0.15: v25.88,21.76 29.26,21.76 P1.01/2.4B.P$AD6 | v13.01,29.63 12.63,30.01 12.13,30.01 D4.4
  Route15 0.15: v25.88,21.76 20.88,21.76 v13.01,29.63
D-  (via drill 0.3)
  Top 0.15: v26.01,23.26 27.76,23.26 28.76,22.26 29.26,22.26 P1.01/2.4B.P$AD4 | v13.51,30.38 13.51,28.88 12.63,28.01 12.13,28.01 D4.6
  Route15 0.15: v26.01,23.26 24.88,23.26 23.01,25.13 23.01,29.38 21.01,31.38 15.76,31.38 14.76,30.38 v13.51,30.38
DN  (via drill 0.3)
  Top 0.15: 22.51,27.63 22.38,27.76 22.38,28.51 J3.A7 | 22.51,27.63 23.13,27.63 23.38,27.88 23.38,28.51 J3.B7 | v15.51,28.13 14.63,28.13 D4.1 | 22.51,27.63 v22.38,27.51
  Route15 0.15: v15.51,28.13 20.13,28.13 20.26,28.26 21.63,28.26 v22.38,27.51
DP  (via drill 0.3)
  Top 0.15: 22.01,29.51 22.13,29.63 22.63,29.63 22.88,29.38 22.88,28.63 J3.A6 | 22.01,29.51 21.88,29.38 21.88,28.63 J3.B6 | v16.38,30.76 15.63,30.01 14.63,30.01 D4.3 | 22.01,29.51 v21.88,29.63
  Route15 0.15: v16.38,30.76 20.76,30.76 v21.88,29.63
EPD_3V3  (via drill 0.3)
  Top 0.15: 42.13,25.76 42.13,27.63 42.88,28.38 42.88,28.63 L5.2 42.88,28.76 42.88,29.26 v41.01,31.13 | 42.13,25.76 42.13,25.38 C1-EP-DR.1 | 42.13,25.76 40.76,24.38 DMG2305UX-7.3 | J2.16 10.63,15.76 10.63,16.13 J2.15 10.76,16.26 11.26,16.26 12.38,17.38 15.26,17.38 16.26,18.38 | 16.26,18.38 17.26,19.38 17.26,19.88 EPD_C5.2 | 16.26,18.38 v16.13,18.51
  Route15 0.15: v41.01,31.13 31.38,31.13 30.38,32.13 14.26,32.13 10.63,28.51 10.63,25.38 16.13,19.88 v16.13,18.51
EPD_BUSY  (via drill 0.3)
  Top 0.15: v28.76,18.26 28.26,18.76 28.26,19.51 29.01,20.26 29.26,20.26 P1.01/2.4B.P$AD12 | v11.38,19.63 11.01,19.26 10.76,19.26 J2.9
  Route15 0.15: v13.01,31.76 13.01,31.38 9.01,27.38 9.01,22.01 v11.38,19.63
  Bottom 0.15: v28.76,18.26 29.76,18.26 31.01,17.01 33.38,17.01 34.01,16.38 34.01,14.76 34.88,13.88 35.13,13.88 38.51,17.26 38.51,22.38 33.51,27.38 33.51,28.63 32.13,30.01 28.13,30.01 26.38,31.76 v13.01,31.76
EPD_CS  (1 unrouted)
EPD_DC  (via drill 0.3)
  Top 0.15: v24.26,19.38 26.38,19.38 27.76,20.76 29.26,20.76 P1.01/2.4B.P$AD10 | v11.38,18.01 11.13,18.26 10.76,18.26 J2.11
  Bottom 0.15: v24.26,19.38 22.76,17.88 11.51,17.88 v11.38,18.01
EPD_RST  (1 unrouted)
GDR
  Top 0.15: R2_EP_DR.2 31.88,31.38 31.88,31.76 31.13,32.51 Q2.1 31.01,32.63 30.51,32.63 29.76,31.88 19.01,31.88 17.26,30.13 17.26,29.26 12.76,24.76 12.76,24.26 11.26,22.76 10.76,22.76 J2.2
GND  (via drill 0.3, 0.35)  (9 unrouted)
  Top 0.15: J1.3 31.38,11.76 32.51,11.76 J1.5 32.63,11.76 33.01,11.76 33.38,12.13 34.88,12.13 v34.91,12.21 | IC2.C2 8.13,31.76 7.88,31.76 IC2.C1 | P1.01/2.4B.P$F23 34.13,17.26 33.26,18.13 P1.01/2.4B.P$74 34.38,20.63 | 34.38,20.63 35.26,21.51 P1.01/2.4B.P$B7 | 34.38,20.63 P1.01/2.4B.P$76
  other vias: 13.71,32.61 13.41,16.91 15.61,13.61 15.21,12.51 15.41,10.21 15.31,9.21 10.91,7.51 5.41,5.51 15.01,3.81 26.11,3.91 26.11,5.81 37.11,2.81 41.71,3.01 39.81,9.21 41.41,12.71 41.01,15.01 40.31,18.51 40.41,25.51 36.21,27.41 33.01,28.41 28.31,30.51 22.61,22.91 21.71,15.21 17.01,18.41 14.71,20.21 16.11,22.31 9.71,27.01 34.71,6.91 40.51,11.41 23.91,25.51 22.21,26.61 9.31,33.51 6.01,31.51 9.21,21.01 8.71,13.91 7.81,12.41 6.51,8.21 36.91,32.01 30.11,31.51 19.81,21.51 18.01,4.81 36.51,21.51 23.31,19.11 17.41,16.91
  pour Route2: -5.52,-2.92 47.53,-2.92 47.53,37.33 -5.62,37.33 -5.52,-1.78 -5.52,-1.78 -5.52,-1.79 -5.52,-1.81 -5.52,-1.81
  pour Top: -6.92,-4.92 48.73,-4.92 48.73,38.33 -6.92,38.33
  pour Bottom: -7.52,-6.32 49.53,-6.32 49.53,38.63 -7.02,38.63 -7.52,-5.09
HAPTIC_EN  (via drill 0.3)
  Top 0.15: v30.63,24.88 31.38,24.13 31.38,23.26 P1.01/2.4B.P$U1 | v18.63,8.13 18.63,8.01 18.38,7.76 IC4.A1
  Route15 0.15: v30.63,24.88 27.88,27.63 27.88,28.13 29.01,29.26 35.26,29.26 v43.13,21.38
  Bottom 0.15: v43.13,21.38 43.13,8.51 38.63,4.01 26.76,4.01 21.01,9.76 20.51,9.76 19.63,8.88 19.63,8.76 19.01,8.13 v18.63,8.13
IMU_INT1  (via drill 0.3)
  Top 0.15: v31.13,27.63 31.01,27.63 30.01,26.63 30.01,26.38 32.38,24.01 32.38,23.26 P1.01/2.4B.P$N1 | v39.63,5.88 39.51,5.76 39.13,5.76 IC3.5
  Route15 0.15: v31.13,27.63 34.88,27.63 42.88,19.63 42.88,9.13 v39.63,5.88
IMU_INT2  (1 unrouted)
LX1  (via drill 0.3)
  Top 0.15: 8.63,32.13 8.26,32.13 IC2.B2 | 8.63,32.13 8.88,32.13 v9.13,32.38 | v3.51,32.38 3.51,32.01 2.88,31.38 L1.1 | 8.63,32.13 IC2.B3
  Route15 0.15: v3.51,32.38 v9.13,32.38
LX2  (via drill 0.3)
  Top 0.15: IC2.D3 8.26,31.38 IC2.D2 | IC2.D3 8.88,31.38 v9.13,31.13 | v4.01,30.38 2.88,29.26 L1.2 | IC2.D3
  Route15 0.15: v9.13,31.13 6.51,31.13 5.76,30.38 v4.01,30.38
MOSI  (1 unrouted)
N$1
  Top 0.15: IC1.D1 18.51,14.76 18.76,15.01 18.76,16.26 R9.2
N$2  (via drill 0.3)
  Top 0.15: v35.01,14.38 34.76,14.38 32.38,16.76 P1.01/2.4B.P$N24 | v30.63,28.63 30.26,29.01 30.01,29.01 C9.1
  Bottom 0.15: v35.01,14.38 38.13,17.51 38.13,22.26 31.76,28.63 v30.63,28.63
N$3  (via drill 0.3)
  Top 0.15: v34.51,15.88 33.88,16.51 33.88,16.76 34.01,16.88 33.63,17.26 P1.01/2.4B.P$H23 | v42.26,19.38 42.51,19.63 43.01,19.63 LL1.1 | v31.76,30.51 30.63,30.51 CC3.2
  Route15 0.15: v34.51,15.88 35.63,15.88 35.76,16.01 38.88,16.01 v42.26,19.38
  Bottom 0.15: v31.76,30.51 32.13,30.51 42.26,20.38 v42.26,19.38
N$4
  Top 0.15: IC2.D1 7.76,31.38 6.51,31.38 6.13,31.01 5.51,31.01 R2.2
N$5
  Top 0.15: IC2.E1 7.76,31.01 7.51,30.76 7.51,29.76 7.76,29.51 7.76,29.26 R3.2
N$6  (via drill 0.3)
  Top 0.15: v30.01,23.51 29.76,23.26 29.76,22.01 P1.01/2.4B.P$AC5 | v27.26,27.38 27.13,27.26 27.13,26.76 C20.2
  Route15 0.15: v30.01,23.51 28.38,25.13 28.38,26.26 v27.26,27.38
N$7
  Top 0.15: 42.88,14.01 42.88,11.51 C22.2 42.88,11.38 42.88,11.13 42.01,10.26 42.01,8.88 ANT1.1 | 42.88,14.01 43.01,14.13 43.01,18.38 LL1.2 | 42.88,14.01 CC4.2
N$8
  Top 0.15: P1.01/2.4B.P$B24 35.38,16.76 35.38,16.51 35.88,16.01 38.38,16.01 X1.1 38.51,15.88 38.76,15.63 38.76,14.01 CC1.1
N$9
  Top 0.15: X1.3 39.88,17.51 39.38,18.01 37.76,18.01 37.01,17.26 35.88,17.26 P1.01/2.4B.P$A23 | X1.3 41.88,17.13 CC2.1 | X1.3
N$10  (via drill 0.3)
  Top 0.15: v27.76,25.26 26.51,25.26 CC11.1 | v35.88,16.63 35.88,16.76 35.38,17.26 35.13,17.26 35.01,17.13 34.88,17.26 34.63,17.26 P1.01/2.4B.P$D23
  Bottom 0.15: v27.76,25.26 29.13,25.26 29.38,25.51 32.38,25.51 33.13,24.76 35.13,24.76 37.01,22.88 37.01,20.26 37.13,20.13 37.13,18.76 35.88,17.51 v35.88,16.63
N$11  (via drill 0.3)
  Top 0.15: v31.38,26.38 34.26,23.51 34.26,23.13 34.13,23.01 34.13,22.76 P1.01/2.4B.P$F2 | v25.01,22.63 25.13,22.63 25.38,22.38 25.38,20.76 v26.26,19.88 | 24.76,14.13 24.88,14.13 25.01,14.01 C18.1 | 24.76,14.13 v24.38,14.13 | 24.76,14.13 25.63,15.01 25.63,15.88 X2.1
  Bottom 0.15: v31.38,26.38 30.88,25.88 27.76,25.88 25.01,23.13 v25.01,22.63 | v26.26,19.88 26.26,18.01 24.38,16.13 v24.38,14.13
N$12  (via drill 0.3)
  Top 0.15: v40.51,19.38 39.63,18.51 37.76,18.51 37.01,17.76 35.88,17.76 P1.01/2.4B.P$A22 | v35.01,26.51 34.13,27.38 33.88,27.38 C12.1
  Bottom 0.15: v40.51,19.38 40.51,20.38 39.13,21.76 39.13,22.38 v35.01,26.51
N$13  (via drill 0.3)
  Top 0.15: v39.51,19.01 38.38,20.13 38.13,20.13 36.76,18.76 35.88,18.76 P1.01/2.4B.P$A18 | v26.13,11.26 25.51,11.88 23.26,11.88 21.13,14.01 21.13,15.51 21.26,15.63 21.26,17.88 21.51,18.13 22.01,18.13 C13.1
  Bottom 0.15: v39.51,19.01 39.51,17.76 34.13,12.38 29.88,12.38 29.01,13.26 28.13,13.26 v26.13,11.26
N$14
  Top 0.15: LL3.2 23.88,24.01 24.26,24.01 25.76,22.51 26.01,22.51 LL2.1
N$15  (via drill 0.3)
  Top 0.15: v35.88,22.38 35.76,22.51 35.38,22.51 P1.01/2.4B.P$B3 | v28.01,22.38 27.88,22.51 27.38,22.51 LL2.2
  Bottom 0.15: v35.88,22.38 35.38,22.88 29.38,22.88 28.88,22.38 v28.01,22.38
N$17  (via drill 0.3)
  Top 0.15: C16.1 21.26,23.38 21.51,23.38 22.26,24.13 22.51,24.13 LL3.1 22.63,24.01 22.63,23.63 23.51,22.76 24.13,22.76 24.63,22.26 24.63,22.01 C15.1 24.63,21.88 24.63,21.63 24.51,21.51 | 24.51,21.51 23.88,20.88 23.88,20.38 CC10.1 | v35.13,15.26 35.13,16.01 34.38,16.76 P1.01/2.4B.P$E24 | v37.63,21.01 36.63,22.01 36.13,22.01 36.01,21.88 35.51,21.88 35.38,22.01 P1.01/2.4B.P$B5 | v24.88,21.13 24.51,21.51
  Bottom 0.15: 35.38,15.51 37.63,17.76 v37.63,21.01 | 35.38,15.51 v35.13,15.26 | v24.88,21.13 28.76,21.13 30.13,22.51 34.76,22.51 35.38,21.88 35.38,15.51
N$18  (via drill 0.3)
  Top 0.15: v37.63,22.13 36.88,22.88 35.13,22.88 35.01,22.76 34.63,22.76 P1.01/2.4B.P$D2 | v29.38,27.76 27.51,25.88 25.01,25.88 24.76,26.13 22.76,26.13 20.38,23.76 20.38,20.26 v20.88,19.76 | X2.2 25.76,18.38 v24.88,17.51 24.88,16.88 22.51,14.51 22.51,14.01 C17.1
  Route15 0.15: v37.63,22.13 37.01,22.13 32.38,26.76 31.88,26.76 31.63,27.01 30.88,27.01 30.13,27.76 v29.38,27.76 | v20.88,19.76 23.13,17.51 v24.88,17.51
N$19
  Top 0.15: IC3.1 37.51,5.26 37.13,5.26 36.51,5.88 36.51,6.76 37.26,7.51 39.51,7.51 40.13,6.88 40.13,5.76 40.76,5.13 R8.1
N$20  (via drill 0.3)
  Top 0.15: v24.76,24.26 25.01,24.01 27.13,24.01 28.26,25.13 28.26,25.38 31.01,28.13 31.26,28.13 31.63,27.76 31.63,27.01 34.76,23.88 34.76,23.26 P1.01/2.4B.P$C1 | v22.38,19.13 23.38,18.13 23.63,18.13 CC5.2
  Bottom 0.15: v24.76,24.26 24.76,23.88 22.38,21.51 v22.38,19.13
N$21  (via drill 0.3)
  Top 0.15: v43.76,29.88 44.01,29.63 44.01,29.13 C2-EP-DR.1 | v41.26,32.26 40.76,32.76 40.76,33.01 D2.2 | v22.63,6.13 19.76,9.01 19.76,11.26 D1.1
  Route15 0.15: v41.26,32.26 41.38,32.26 v43.76,29.88 43.76,8.88 38.76,3.88 32.26,3.88 31.63,3.26 25.88,3.26 23.01,6.13 v22.63,6.13
N$22
  Top 0.15: R1_EP_DR.2 35.63,34.63 35.26,34.63 35.13,34.51 32.38,34.51 31.76,33.88 31.13,33.88 Q2.2
N$23
  Top 0.15: SJ1.2 36.13,30.51 36.13,32.13 R_TYPE_SEL.2 36.13,32.26 35.63,32.76 35.63,34.01 R1_EP_DR.1
N$24
  Top 0.15: 33.38,33.26 29.01,33.26 Q2.3 | 33.38,33.26 33.51,33.38 D3.2 33.38,33.26 | C2-EP-DR.2 44.13,27.88 45.01,28.76 45.01,30.38 43.63,31.76 41.01,31.76 38.38,29.13 38.38,28.76 L5.1 38.38,28.63 37.63,27.88 36.01,27.88 35.88,27.76 35.26,27.76 34.88,28.13 34.88,30.26 33.38,31.76 33.38,33.26
N$25
  Top 0.15: J2.4 10.76,21.76 11.26,21.76 13.38,23.88 EPD_C2.2
N$26
  Top 0.15: J2.5 10.76,21.26 11.26,21.26 12.51,22.51 13.76,22.51 EPD_C1.2
N$27
  Top 0.15: R15.2 21.63,27.38 21.26,27.76 21.13,27.76 20.88,28.01 20.88,28.51 J3.B5
N$28  (via drill 0.3)
  Top 0.15: v9.88,14.38 10.01,14.26 10.63,14.26 J2.19 | v12.13,20.38 12.13,21.01 EPD_C7.2
  Route15 0.15: v9.88,14.38 12.13,16.63 v12.13,20.38
N$29
  Top 0.15: C5.2 11.76,8.51 11.76,6.76 13.76,4.76 14.01,4.76 14.38,4.38 16.51,4.38 R11.1
N$30  (via drill 0.3)
  Top 0.15: v11.01,10.63 10.76,10.88 10.76,11.63 J2.24 | v12.13,13.51 12.76,13.51 12.88,13.38 EPD_C12.2
  Bottom 0.15: v11.01,10.63 11.01,12.38 v12.13,13.51
N$31  (via drill 0.3)
  Top 0.15: v11.38,14.63 11.26,14.76 10.76,14.76 J2.18 | v14.13,21.01 14.51,21.38 14.88,21.38 EPD_C6.2
  Route15 0.15: v11.38,14.63 12.01,14.63 14.01,16.63 14.01,20.88 v14.13,21.01
N$32
  Top 0.15: J2.20 10.76,13.76 11.51,13.76 12.51,14.76 12.76,14.76 EPD_C8.2
N$33
  Top 0.15: R12.1 32.76,5.63 32.76,5.26 32.88,5.13 34.38,5.13 34.88,5.63 C10.2
N$34
  Top 0.15: EPD_C10.2 12.76,9.51 11.38,10.88 11.38,12.51 11.13,12.76 10.76,12.76 J2.22
N$35
  Top 0.15: C11.2 14.51,5.38 15.38,5.38 15.76,5.76 15.76,6.01 R13.1
N$36
  Top 0.15: R14.1 23.63,26.88 23.63,27.63 23.88,27.88 23.88,28.51 J3.A5
N$37
  Top 0.15: IC4.A2 18.38,7.13 18.63,7.13 19.13,7.63 19.13,8.26 18.13,9.26 C3.2
OUT+
  Top 0.15: IC4.A3 18.38,6.63 19.76,5.26 19.76,4.13 TP_OP.TP
OUT-  (via drill 0.3)
  Top 0.15: v17.38,6.01 17.13,6.26 17.13,6.51 17.26,6.63 IC4.C3 | v20.63,9.26 21.76,10.38 22.51,10.38 TP_ON.TP
  Bottom 0.15: v20.63,9.26 v17.38,6.01
P0.13  (via drill 0.3)
  Top 0.15: v26.88,20.51 27.63,21.26 29.26,21.26 P1.01/2.4B.P$AD8 | v11.26,3.26 10.63,3.88 SW1.2
  Route15 0.15: v26.88,20.51 26.88,18.01 17.76,8.88 16.76,8.88 11.26,3.38 v11.26,3.26
P0.14  (via drill 0.3)
  Top 0.15: v29.76,21.51 29.76,21.01 P1.01/2.4B.P$AC9 | v25.76,8.76 25.76,8.63 22.26,5.13 22.01,5.13 21.51,4.63 21.51,4.13 SW2.2
  Bottom 0.15: v29.76,21.51 29.76,21.01 25.01,16.26 25.01,9.51 v25.76,8.76
P1.01  (via drill 0.3)
  Top 0.15: v29.76,17.51 29.88,17.51 30.13,17.26 30.51,17.26 P1.01/2.4B.P$Y23 | v40.13,21.38 39.63,21.88 39.63,22.01 | 39.63,22.01 39.63,22.26 DMG2305UX-7.1 39.63,22.01 | 39.63,22.01 40.26,22.01 R_PWR_EPD.1
  Route15 0.15: v29.76,17.51 35.26,17.51 36.76,19.01 38.51,19.01 39.13,19.63 39.13,20.38 v40.13,21.38
P1.02  (via drill 0.3)
  Top 0.15: v30.63,16.13 30.63,16.38 30.88,16.63 30.88,16.76 P1.01/2.4B.P$W24 | v32.38,5.01 32.76,4.63 32.76,4.38 32.51,4.13 SW3.2
  Route15 0.15: v30.63,16.13 30.63,15.76 30.38,15.51 30.38,7.01 v32.38,5.01
PMIC_INT  (1 unrouted)
PREVGH  (via drill 0.3)
  Top 0.15: EPD_C9.2 12.88,12.01 12.63,12.01 11.38,13.26 10.76,13.26 J2.21 10.63,13.26 v9.88,13.26 | v32.38,31.76 33.51,30.63 33.51,30.01 D3.1
  Route15 0.15: v32.38,31.76 31.26,31.76 30.51,32.51 14.63,32.51 13.88,33.26 13.51,33.26 8.13,27.88 8.13,13.63 8.51,13.26 v9.88,13.26
PREVGL
  Top 0.15: 10.13,10.88 10.13,11.26 9.88,11.51 9.88,12.01 10.13,12.26 10.63,12.26 J2.23 | 10.13,10.88 10.13,8.63 EPD_C11.2 | 10.13,10.88 12.38,8.63 15.38,8.63 16.13,9.38 16.13,11.26 D1.2
RESET  (1 unrouted)
  Top 0.15: J1.6 32.63,12.88 33.01,12.51 34.51,12.51 34.76,12.76 35.01,12.76 35.38,12.38 35.38,10.63 34.38,9.63 TP_RESET.TP
SCK  (via drill 0.3)
  Top 0.15: v36.38,20.51 36.13,20.26 35.88,20.26 P1.01/2.4B.P$A12 | v14.63,19.26 13.13,17.76 11.76,17.76 11.26,17.26 10.76,17.26 J2.13
  Route15 0.15: v36.38,20.51 35.13,21.76 35.13,22.13 31.51,25.76 30.38,25.76 28.51,27.63 v28.51,27.88
  Bottom 0.15: v28.51,27.88 27.51,26.88 25.26,26.88 25.13,27.01 23.26,27.01 15.51,19.26 v14.63,19.26
SCL  (via drill 0.3)  (1 unrouted)
  Top 0.15: 5.13,29.26 5.26,29.13 R4.1 | 5.13,29.26 4.88,29.51 4.88,31.01 R2.1 | 3.63,27.76 5.13,29.26 | 3.63,27.76 1.88,27.76 1.51,27.38 TP_SCL.TP | 16.88,8.13 16.88,10.13 18.88,12.13 18.88,13.88 18.76,14.01 18.51,14.01 IC1.B1 | 16.88,8.13 17.26,7.76 IC4.C1 | v38.13,6.13 38.13,6.01 37.88,5.76 37.51,5.76 IC3.12 | 16.88,8.13 v16.76,8.01 | v7.51,4.01 7.51,4.76 U1.7 | v3.63,27.63 3.63,27.76
  Route15 0.15: v38.13,6.13 37.38,6.13 35.63,4.38 26.51,4.38 24.13,6.76 17.26,6.76 17.01,6.51 16.51,6.51 16.13,6.88 16.13,7.38 v16.76,8.01 | v3.63,27.63 6.51,24.76 7.26,24.76 7.76,24.26 7.76,13.26 8.38,12.63 8.38,10.88 5.88,8.38 5.88,5.88 7.51,4.26 v7.51,4.01
  Bottom 0.15: v7.51,4.01 12.76,4.01 v16.76,8.01
SDA  (via drill 0.3)  (1 unrouted)
  Top 0.15: v6.63,25.51 6.63,25.01 R5.1 | v6.63,27.26 6.26,26.88 5.63,26.88 | 5.63,26.88 5.38,26.88 TP_SDA.TP 5.63,26.88 | 5.63,26.88 5.63,27.63 7.13,29.13 R3.1 | v19.26,15.88 19.26,14.88 18.76,14.38 18.51,14.38 IC1.C1 | v8.51,5.13 8.13,4.76 U1.8 | v30.51,26.51 32.88,24.13 32.88,23.26 P1.01/2.4B.P$L1 | v37.76,4.51 38.01,4.76 38.01,5.13 IC3.2
  Route15 0.15: v6.63,27.26 v6.63,25.51 | v19.26,15.88 19.26,15.01 9.38,5.13 v8.51,5.13
  Bottom 0.15: v30.51,26.51 30.26,26.26 27.63,26.26 24.13,22.76 24.13,21.01 25.26,19.88 25.38,19.88 25.76,19.51 25.76,19.26 22.38,15.88 | v19.26,15.88 22.38,15.88 | v37.76,4.51 26.76,4.51 22.38,8.88 22.38,12.01 | 22.38,15.88 22.38,12.01 | v6.63,25.51 8.76,23.38 8.76,18.13 14.88,12.01 22.38,12.01
SWDCLK
  Top 0.15: 31.26,13.01 30.38,13.88 30.38,15.26 30.13,15.51 30.13,16.26 30.26,16.38 30.26,16.76 P1.01/2.4B.P$AA24 | 31.26,13.01 30.63,12.38 30.63,11.38 30.38,11.13 30.38,9.01 30.63,8.76 30.63,6.76 TP_SWDCLK.TP | 31.26,13.01 J1.4
SWDIO
  Top 0.15: 28.01,13.26 27.01,14.26 27.01,15.51 28.01,16.51 29.51,16.51 29.76,16.76 P1.01/2.4B.P$AC24 | 28.01,13.26 29.63,13.26 29.88,13.01 J1.2 | 28.01,13.26 27.01,12.26 27.01,9.13 28.13,8.01 28.13,7.01 TP_SWDIO.TP
SWO  (via drill 0.3)
  Top 0.15: v27.01,16.76 28.01,17.76 29.26,17.76 P1.01/2.4B.P$AD22 | v25.63,10.51 24.38,9.26 TP_SWO.TP
  Bottom 0.15: v27.01,16.76 27.01,16.38 25.63,15.01 v25.63,10.51
VBAT  (via drill 0.3)
  Top 0.15: IC1.C2 18.01,14.38 16.01,14.38 15.51,14.88 v15.01,14.88 14.26,14.88 C37.1 | U1.2 7.51,6.88 7.13,6.88 U1.3 7.01,6.88 7.01,7.51 | 3.88,7.01 3.01,7.88 3.01,8.26 TP_VBAT.TP | 3.88,7.01 4.51,6.38 C2.2 | 7.01,7.51 6.76,7.76 4.63,7.76 3.88,7.01 | 7.01,7.51 v7.13,7.63
  Route15 0.15: v15.01,14.88 14.38,14.88 v7.13,7.63
VBUS  (via drill 0.3)
  Top 0.15: 17.63,13.13 16.63,12.13 15.51,12.13 14.88,11.51 13.13,11.51 12.76,11.13 12.76,10.88 C38.1 | 17.63,13.13 IC1.A2 | v24.38,13.26 24.51,13.38 25.63,13.38 26.26,12.76 C21.1 | 17.63,13.13 v18.01,12.76 | 16.51,32.38 16.01,32.88 16.01,33.13 C42.2 | 16.51,32.38 16.51,32.01 15.38,30.88 14.51,30.88 | 14.51,30.88 11.63,30.88 11.01,30.26 11.01,29.26 11.26,29.01 12.01,29.01 D4.5 | 16.51,32.38 C43.1 | v27.88,24.13 29.26,22.76 P1.01/2.4B.P$AD2 | v25.26,27.63 25.01,27.88 25.01,28.51 J3.A4_B9 25.01,28.63 24.88,28.76 24.88,29.26 24.01,30.13 21.38,30.13 20.26,29.01 J3.A9_B4 | v14.51,31.01 14.51,30.88
  Route15 0.15: v23.01,15.63 20.13,12.76 v18.01,12.76 | v27.88,24.13 25.26,26.76 v25.26,27.63
  Bottom 0.15: v24.38,13.26 24.38,13.51 23.01,14.88 v23.01,15.63 | v14.51,31.01 17.88,27.63 20.76,27.63 | 20.76,27.63 21.88,27.63 22.26,28.01 24.88,28.01 v25.26,27.63 | v18.01,12.76 15.76,12.76 10.88,17.63 10.88,18.38 15.51,23.01 16.13,23.01 20.76,27.63
VREG  (via drill 0.3)
  Top 0.15: 18.13,17.38 18.51,17.38 19.76,16.13 20.01,16.13 C39.1 | 18.13,17.38 16.51,17.38 14.63,15.51 13.76,15.51 13.63,15.38 13.63,14.51 13.88,14.26 15.63,14.26 15.88,14.01 18.01,14.01 IC1.B2 | 18.13,17.38 18.13,21.51 16.76,22.88 16.76,23.38 C24.2 16.63,23.51 v16.01,23.51 | 8.26,32.51 7.88,32.51 IC2.A1 7.76,32.63 7.26,33.13 6.63,33.13 | 8.26,32.51 8.63,32.51 IC2.A3 | 8.26,32.51 IC2.A2 | 6.63,33.13 4.76,33.13 TP_VREG.TP | v12.63,26.01 12.01,26.01 C23.2 | 6.63,33.13 v6.63,33.01
  Bottom 0.15: 12.63,26.88 12.63,27.01 v6.63,33.01 | 12.63,26.88 v12.63,26.01 | 12.63,26.88 v16.01,23.51
(copper drawn outside any net)
  shapes: Top area x2